# EAGLE board PCBGNDPlane (EAGLE 9.6.2), part 1 of 2
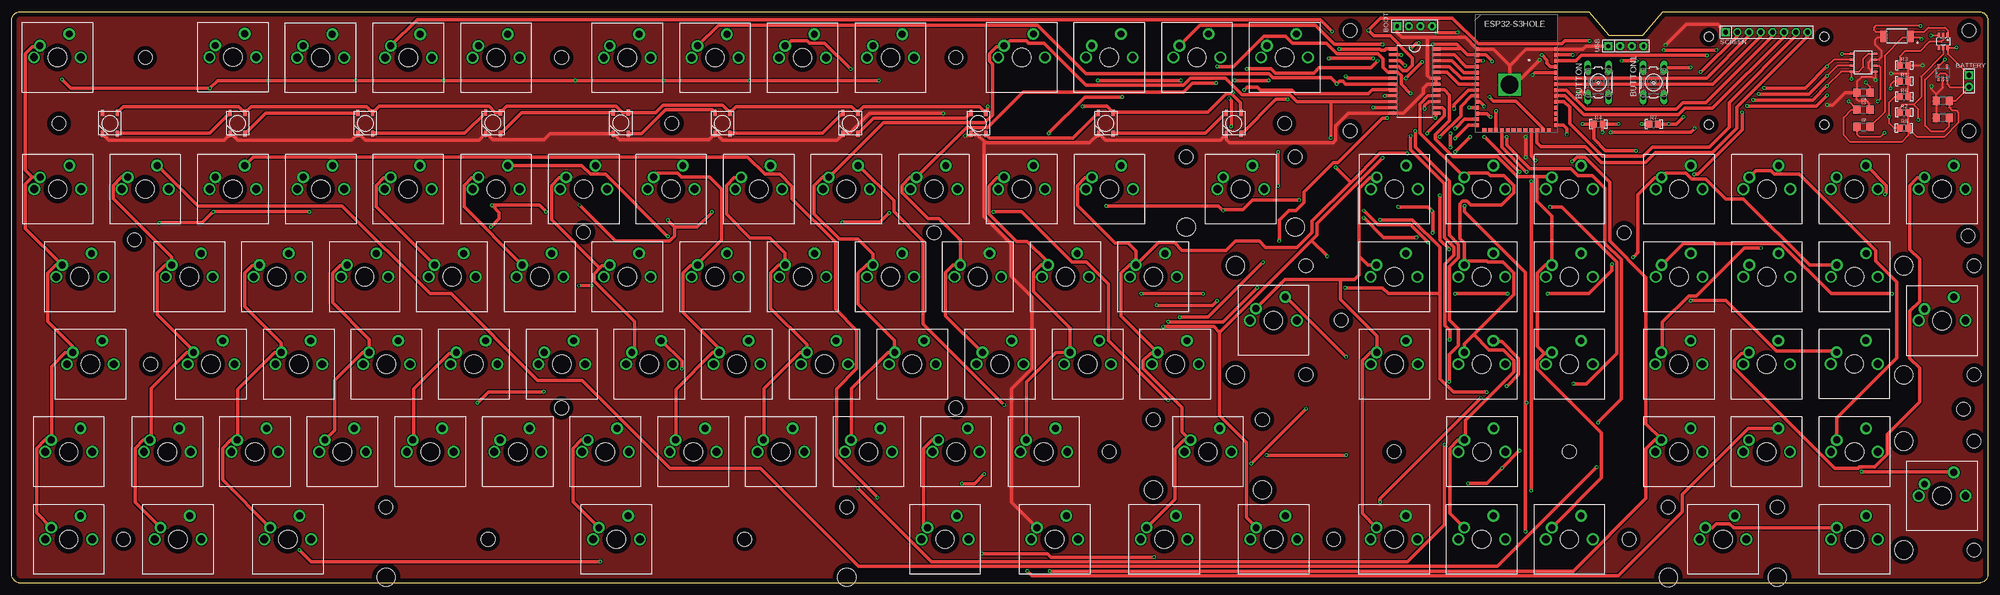
[diagram p0: board, top side]
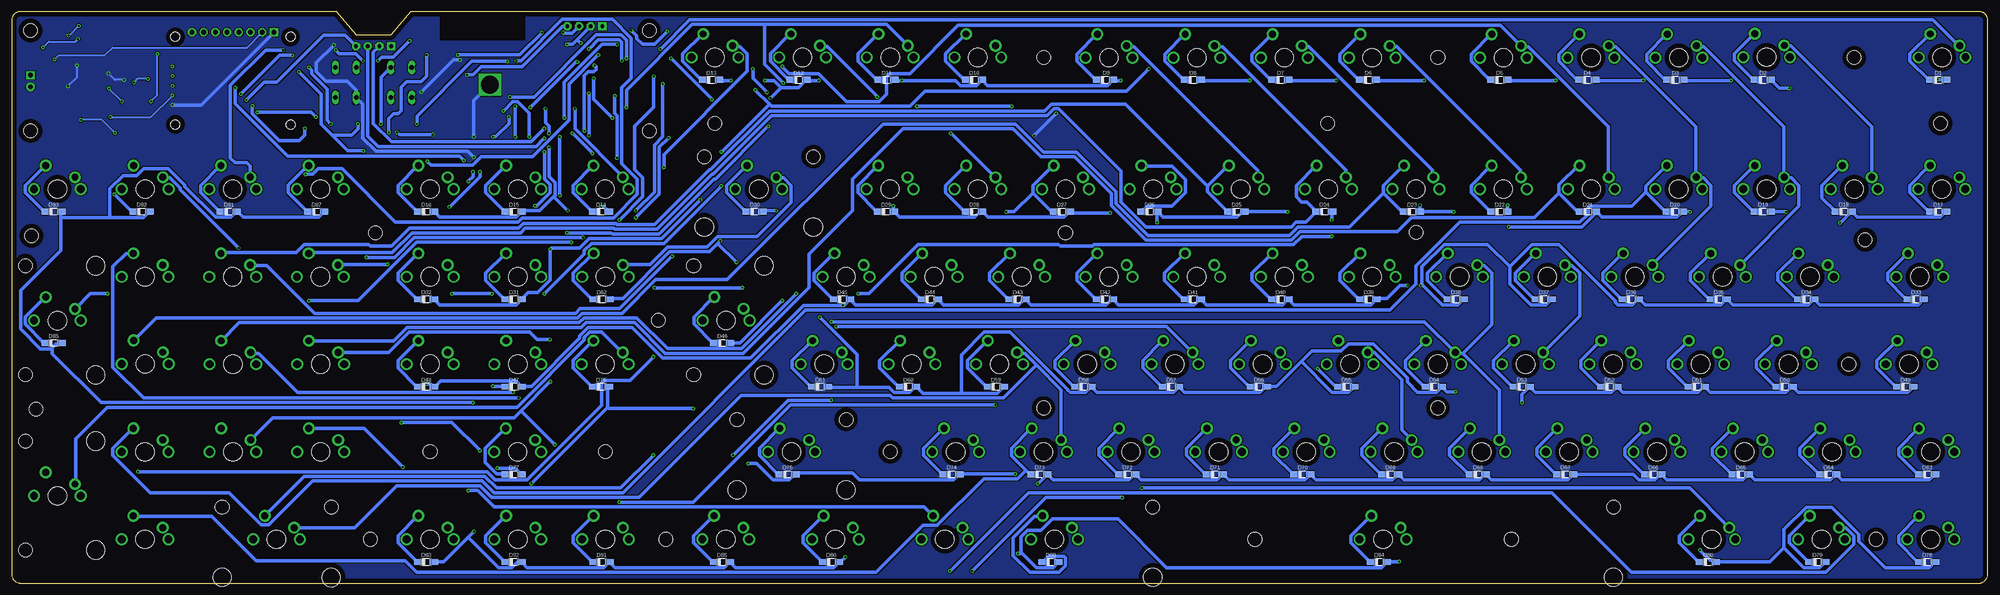
[diagram p1: board, bottom side, seen from below]

Size 428.5 x 124 mm. Coordinates in mm from the lower left corner, seen from the top.
Outline: 428.5,122 428.5,2 arc-90 426.5,0 2.1,0 arc-93 0,2 0,122 arc-90 2,124 342,124 346.35,118.9 353.65,118.9 358,124 426.5,124 arc-90 428.5,122
Copper layers (1*16): Top 0.035mm / dielectric 1.5mm / Bottom 0.035mm
Design rules "default *": minimum track width 15mil, minimum drill 0.35mm, track to track 8mil, track to pad 8mil, pad to pad 8mil, via to via 8mil, smd to smd 6mil, copper to edge 40mil, drill to drill 14mil, minimum pad ring 10mil, minimum via ring 8mil, stop-mask expansion 4mil, vias tented up to drill 0mil, thermal gap 10mil
Net classes: 0 default: width 0.203 mm
Holes 3 mm at 81.2,16.5 181.05,16.5 382.82,16.5 359.18,16.5 425.5,30.82 425.5,7.18 425.5,45.18 425.5,68.83 271.2,35.5 247.55,35.5 280.63,45.18 280.62,68.83 278.32,92.5 254.68,92.5 29,114 119.25,114 204.75,114 10.3,99.75 143.15,99.75 276,99.75 290.25,98.12 290.25,119.88 424.38,119.88 424.38,98.12 423.17,37.77 350.66,9.5 337.75,28.5 424.18,75.36 349.63,76 299.75,28.5 288.25,57 286.68,9.5 238,28.5 204.75,38 158.92,9.5 103.33,9.5 24.25,9.5 119.25,38 200,76 124,76.12 26.62,74.5 30.19,47.5
Holes 4 mm at 81.2,1.25 181.07,1.25 382.82,1.25 359.18,1.24 410.24,7.17 410.24,30.82 410.24,45.18 410.25,68.82 271.2,20.25 247.55,20.25 265.37,45.18 265.37,68.83 254.68,77.25 278.32,77.24
Holes 2 mm at 368,118.5 393,118.5 368,99.5 393,99.5
tKeepout: area 317.2,117.5 to 335.3,123.8
bKeepout: area 317.2,117.5 to 335.3,123.8

## Footprints (pad centres in the part's own frame; a part is rotated, then mirrored left to right if it is on the bottom)
SIP-100-02-40 = drill 1.016 pad 1.778 square: 1 -1.27,0 | drill 1.016 pad 1.778 octagon: 2 1.27,0
SIP-100-04-32 = drill 0.813 pad 1.778 square: 1 -3.81,0 | drill 0.813 pad 1.778 octagon: 2 -1.27,0; 3 1.27,0; 4 3.81,0
B3F-10XX = drill 1.016 long: 1 -3.251,2.261; 2 3.251,2.261; 3 -3.251,-2.261; 4 3.251,-2.261
1206 = smd 1.6 x 1.8: 1 -1.4,0; 2 1.4,0
SOD123FL = smd 1.8 x 1.25: A 1.7,0; C -1.7,0
CHERRY-MX = drill 1.714 pad 1.93: P$3 -5.08,0; P$4 5.08,0 | drill 1.5 pad 2.54: SW1 -3.81,2.54; SW2 2.54,5.08 | hole 4: 0,0
SOP65P640X120-8N = smd 1.56 x 0.4: 1 -2.88,0.975; 2 -2.88,0.325; 3 -2.88,-0.325; 4 -2.88,-0.975; 5 2.88,-0.975; 6 2.88,-0.325; 7 2.88,0.325; 8 2.88,0.975
R-0805 = smd 1.3 x 1.5: 1 -0.95,0; 2 0.95,0
SIP-100-08-40 = drill 1.016 pad 1.778 square: 1 -8.89,0 | drill 1.016 pad 1.778 octagon: 2 -6.35,0; 3 -3.81,0; 4 -1.27,0; 5 1.27,0; 6 3.81,0; 7 6.35,0; 8 8.89,0
ESP32-S3HOLE = smd 0.838 x 0.889: 1 -8.581,5.254; 2 -8.581,3.984; 3 -8.581,2.714; 4 -8.581,1.444; 5 -8.581,0.174; 6 -8.581,-1.096; 7 -8.581,-2.366; 8 -8.581,-3.636; 9 -8.581,-4.906; 10 -8.581,-6.176; 11 -8.581,-7.446; 12 -8.581,-8.716; 13 -8.581,-9.986; 14 -8.581,-11.256; 27 8.581,-11.256; 28 8.581,-9.986; 29 8.581,-8.716; 30 8.581,-7.446; 31 8.581,-6.176; 32 8.581,-4.906; 33 8.581,-3.636; 34 8.581,-2.366; 35 8.581,-1.096; 36 8.581,0.174; 37 8.581,1.444; 38 8.581,2.714; 39 8.581,3.984; 40 8.581,5.254 | smd 0.889 x 0.838: 15 -6.985,-12.331; 16 -5.715,-12.331; 17 -4.445,-12.331; 18 -3.175,-12.331; 19 -1.905,-12.331; 20 -0.635,-12.331; 21 0.635,-12.331; 22 1.905,-12.331; 23 3.175,-12.331; 24 4.445,-12.331; 25 5.715,-12.331; 26 6.985,-12.331 | drill 3.81 pad 4.191 square: 41 -1.499,-2.464
ME6211C33M5G = smd 0.953 x 0.559: 1 -1.378,0.94; 2 -1.378,0; 3 -1.378,-0.94; 4 1.378,-0.94; 5 1.378,0.94
WS2812B5050 = smd 1.422 x 0.711: LED_DI 4.8,4.1; LED_DO 0.2,0.9; LED_GND 4.8,0.9; LED_VDD 0.2,4.1
74HC154D = smd 2.05 x 0.6: 1 -4.655,6.985; 2 -4.655,5.715; 3 -4.655,4.445; 4 -4.655,3.175; 5 -4.655,1.905; 6 -4.655,0.635; 7 -4.655,-0.635; 8 -4.655,-1.905; 9 -4.655,-3.175; 10 -4.655,-4.445; 11 -4.655,-5.715; 12 -4.655,-6.985; 13 4.655,-6.985; 14 4.655,-5.715; 15 4.655,-4.445; 16 4.655,-3.175; 17 4.655,-1.905; 18 4.655,-0.635; 19 4.655,0.635; 20 4.655,1.905; 21 4.655,3.175; 22 4.655,4.445; 23 4.655,5.715; 24 4.655,6.985
SOT23-8 = smd 0.42 x 0.835: 1 -1.905,-2.58; 2 -0.635,-2.58; 3 0.635,-2.58; 4 1.905,-2.58; 5 1.905,2.58; 6 0.635,2.58; 7 -0.635,2.58; 8 -1.905,2.58
SOT23-6 = smd 0.55 x 1.2: 1 -0.95,-1.3; 2 0,-1.3; 3 0.95,-1.3; 4 0.95,1.3; 5 0,1.3; 6 -0.95,1.3

## Placement (x,y rotation side)
BATTERY  F-1X02-SIP-100-40  [SIP-100-02-40]  424.4,108.9 270 top
BOOT  BOOT  [SIP-100-04-32]  304.2,120.8 0 top
BUTTON  1  [B3F-10XX]  344,108.6 90 top
BUTTON1  1  [B3F-10XX]  356,108.6 90 top
C1  1.0uF  [1206]  401.5,102.7 0 top
C2  1.0uF  [1206]  401.5,99 0 top
C3  1.0uF  [1206]  418.7,104.6 180 top
C4  1.0uF  [1206]  401.5,106.4 180 top
C5  1.0uF  [1206]  418.7,100.9 180 top
D1  [SOD123FL]  10.8,109.2 0 bottom
D2  [SOD123FL]  48.8,109.2 0 bottom
D3  [SOD123FL]  67.8,109.2 0 bottom
D4  [SOD123FL]  86.9,109.2 0 bottom
D5  [SOD123FL]  105.9,109.2 0 bottom
D6  [SOD123FL]  134.4,109.2 0 bottom
D7  [SOD123FL]  153.4,109.2 0 bottom
D8  [SOD123FL]  172.4,109.2 0 bottom
D9  [SOD123FL]  191.4,109.2 0 bottom
D10  [SOD123FL]  219.8,109.2 0 bottom
D11  [SOD123FL]  238.8,109.2 0 bottom
D12  [SOD123FL]  257.9,109.2 0 bottom
D13  [SOD123FL]  276.8,109.2 0 bottom
D14  [SOD123FL]  300.7,80.6 0 bottom
D15  [SOD123FL]  319.6,80.6 0 bottom
D16  [SOD123FL]  338.6,80.6 0 bottom
D17  [SOD123FL]  10.8,80.6 0 bottom
D18  [SOD123FL]  31.3,80.6 0 bottom
D19  [SOD123FL]  48.8,80.6 0 bottom
D20  [SOD123FL]  67.9,80.6 0 bottom
D21  [SOD123FL]  86.8,80.6 0 bottom
D22  [SOD123FL]  105.9,80.6 0 bottom
D23  [SOD123FL]  124.9,80.6 0 bottom
D24  [SOD123FL]  143.9,80.6 0 bottom
D25  [SOD123FL]  162.9,80.6 0 bottom
D26  [SOD123FL]  181.8,80.6 0 bottom
D27  [SOD123FL]  200.8,80.6 0 bottom
D28  [SOD123FL]  219.8,80.6 0 bottom
D29  [SOD123FL]  238.9,80.6 0 bottom
D30  [SOD123FL]  267.4,80.6 0 bottom
D31  [SOD123FL]  319.6,61.6 0 bottom
D32  [SOD123FL]  338.6,61.6 0 bottom
D33  [SOD123FL]  15.6,61.6 0 bottom
D34  [SOD123FL]  39.4,61.6 0 bottom
D35  [SOD123FL]  58.4,61.6 0 bottom
D36  [SOD123FL]  77.4,61.6 0 bottom
D37  [SOD123FL]  96.3,61.6 0 bottom
D38  [SOD123FL]  115.4,61.6 0 bottom
D39  [SOD123FL]  134.3,61.6 0 bottom
D40  [SOD123FL]  153.4,61.6 0 bottom
D41  [SOD123FL]  172.4,61.6 0 bottom
D42  [SOD123FL]  191.4,61.6 0 bottom
D43  [SOD123FL]  210.4,61.6 0 bottom
D44  [SOD123FL]  229.4,61.6 0 bottom
D45  [SOD123FL]  248.4,61.6 0 bottom
D46  [SOD123FL]  274.4,52.1 0 bottom
D47  [SOD123FL]  319.6,42.6 0 bottom
D48  [SOD123FL]  338.6,42.6 0 bottom
D49  [SOD123FL]  17.9,42.6 0 bottom
D50  [SOD123FL]  44.1,42.6 0 bottom
D51  [SOD123FL]  63.1,42.6 0 bottom
D52  [SOD123FL]  82.1,42.6 0 bottom
D53  [SOD123FL]  101.1,42.6 0 bottom
D54  [SOD123FL]  120.1,42.6 0 bottom
D55  [SOD123FL]  139.1,42.6 0 bottom
D56  [SOD123FL]  158.1,42.6 0 bottom
D57  [SOD123FL]  177.1,42.6 0 bottom
D58  [SOD123FL]  196.1,42.6 0 bottom
D59  [SOD123FL]  215.1,42.6 0 bottom
D60  [SOD123FL]  234.1,42.6 0 bottom
D61  [SOD123FL]  253.2,42.6 0 bottom
D62  [SOD123FL]  300.6,61.6 0 bottom
D63  [SOD123FL]  13.2,23.6 0 bottom
D64  [SOD123FL]  34.6,23.6 0 bottom
D65  [SOD123FL]  53.6,23.6 0 bottom
D66  [SOD123FL]  72.6,23.6 0 bottom
D67  [SOD123FL]  91.6,23.6 0 bottom
D68  [SOD123FL]  110.6,23.6 0 bottom
D69  [SOD123FL]  129.6,23.6 0 bottom
D70  [SOD123FL]  148.6,23.6 0 bottom
D71  [SOD123FL]  167.6,23.6 0 bottom
D72  [SOD123FL]  186.6,23.6 0 bottom
D73  [SOD123FL]  205.6,23.6 0 bottom
D74  [SOD123FL]  224.7,23.6 0 bottom
D75  [SOD123FL]  260.3,23.6 0 bottom
D76  [SOD123FL]  300.7,42.6 0 bottom
D77  [SOD123FL]  319.6,23.6 0 bottom
D78  [SOD123FL]  13.2,4.6 0 bottom
D79  [SOD123FL]  37,4.6 0 bottom
D80  [SOD123FL]  60.7,4.6 0 bottom
D81  [SOD123FL]  381.4,80.6 0 bottom
D82  [SOD123FL]  400.3,80.6 0 bottom
D83  [SOD123FL]  419.4,80.6 0 bottom
D84  [SOD123FL]  132,4.6 0 bottom
D85  [SOD123FL]  419.4,52.1 0 bottom
D86  [SOD123FL]  274.5,4.6 0 bottom
D87  [SOD123FL]  362.4,80.6 0 bottom
D88  [SOD123FL]  203.2,4.6 0 bottom
D90  [SOD123FL]  250.8,4.6 0 bottom
D91  [SOD123FL]  300.6,4.6 0 bottom
D92  [SOD123FL]  319.6,4.6 0 bottom
D93  [SOD123FL]  338.6,4.6 0 bottom
DUPLICADO1  CHERRY-MX  [CHERRY-MX]  361.5,28.5 0 top
DUPLICADO2  CHERRY-MX  [CHERRY-MX]  380.5,28.5 0 top
DUPLICADO3  CHERRY-MX  [CHERRY-MX]  399.55,28.5 0 top
DUPLICADO4  CHERRY-MX  [CHERRY-MX]  361.5,47.5 0 top
DUPLICADO5  CHERRY-MX  [CHERRY-MX]  380.5,47.5 0 top
DUPLICADO6  CHERRY-MX  [CHERRY-MX]  399.5,47.55 0 top
DUPLICADO7  CHERRY-MX  [CHERRY-MX]  361.55,66.45 0 top
DUPLICADO8  CHERRY-MX  [CHERRY-MX]  380.55,66.45 0 top
DUPLICADO9  CHERRY-MX  [CHERRY-MX]  399.55,66.45 0 top
DUPLICADO10  CHERRY-MX  [CHERRY-MX]  371.05,9.5 0 top
ENTERDUPLICADO  CHERRY-MX  [CHERRY-MX]  418.55,18.95 0 top
FN_KEY  CHERRY-MX  [CHERRY-MX]  226.15,9.5 0 top
PUNTODUPLICADO  CHERRY-MX  [CHERRY-MX]  399.55,9.5 0 top
Q1  FS8205A  [SOP65P640X120-8N]  408.8,118.6 180 top
R1  1K  [R-0805]  410.3,108.9 0 top
R2  1K  [R-0805]  410.3,102.1 0 top
R3  1K  [R-0805]  410.3,112.3 0 top
R4  1K  [R-0805]  344,99.6 0 top
R5  1M  [R-0805]  410.3,98.7 180 top
R6  8200000  [R-0805]  410.3,105.5 0 top
R7  1K  [R-0805]  356,99.6 0 top
SCREEN  F-1X08-SIP-100-40  [SIP-100-08-40]  380.5,119.5 0 top
U1  ESP32-S3HOLE  [ESP32-S3HOLE]  326.3,110.6 0 top
U2  ME6211C33M5G  [ME6211C33M5G]  418.7,110.7 90 top
U$1  CHERRY-MX  [CHERRY-MX]  12.41,9.49 0 top
U$2  CHERRY-MX  [CHERRY-MX]  12.4,28.5 0 top
U$3  CHERRY-MX  [CHERRY-MX]  17.1,47.5 0 top
U$4  CHERRY-MX  [CHERRY-MX]  14.8,66.45 0 top
U$5  CHERRY-MX  [CHERRY-MX]  10,85.5 0 top
U$6  CHERRY-MX  [CHERRY-MX]  9.95,114.05 0 top
U$7  CHERRY-MX  [CHERRY-MX]  36.1,9.5 0 top
U$8  CHERRY-MX  [CHERRY-MX]  33.8,28.5 0 top
U$9  CHERRY-MX  [CHERRY-MX]  43.25,47.5 0 top
U$10  CHERRY-MX  [CHERRY-MX]  38.55,66.45 0 top
U$11  CHERRY-MX  [CHERRY-MX]  29,85.5 0 top
U$12  CHERRY-MX  [CHERRY-MX]  48,114.1 0 top
U$13  CHERRY-MX  [CHERRY-MX]  59.9,9.5 0 top
U$14  CHERRY-MX  [CHERRY-MX]  52.75,28.5 0 top
U$15  CHERRY-MX  [CHERRY-MX]  62.3,47.5 0 top
U$16  CHERRY-MX  [CHERRY-MX]  57.55,66.45 0 top
U$17  CHERRY-MX  [CHERRY-MX]  48,85.5 0 top
U$18  CHERRY-MX  [CHERRY-MX]  67,114 0 top
U$19  CHERRY-MX  [CHERRY-MX]  380.55,85.5 0 top
U$20  CHERRY-MX  [CHERRY-MX]  71.75,28.5 0 top
U$21  CHERRY-MX  [CHERRY-MX]  81.3,47.5 0 top
U$22  CHERRY-MX  [CHERRY-MX]  76.55,66.45 0 top
U$23  CHERRY-MX  [CHERRY-MX]  67.05,85.5 0 top
U$24  CHERRY-MX  [CHERRY-MX]  86.05,114 0 top
U$25  CHERRY-MX  [CHERRY-MX]  399.5,85.5 0 top
U$26  CHERRY-MX  [CHERRY-MX]  90.8,28.5 0 top
U$27  CHERRY-MX  [CHERRY-MX]  100.25,47.5 0 top
U$28  CHERRY-MX  [CHERRY-MX]  95.5,66.45 0 top
U$29  CHERRY-MX  [CHERRY-MX]  86,85.5 0 top
U$30  CHERRY-MX  [CHERRY-MX]  105.05,114 0 top
U$31  CHERRY-MX  [CHERRY-MX]  418.55,85.5 0 top
U$32  CHERRY-MX  [CHERRY-MX]  109.75,28.5 0 top
U$33  CHERRY-MX  [CHERRY-MX]  119.3,47.5 0 top
U$34  CHERRY-MX  [CHERRY-MX]  114.55,66.45 0 top
U$35  CHERRY-MX  [CHERRY-MX]  105.05,85.5 0 top
U$36  CHERRY-MX  [CHERRY-MX]  133.5,114 0 top
U$37  CHERRY-MX  [CHERRY-MX]  131.15,9.5 0 top
U$38  CHERRY-MX  [CHERRY-MX]  128.75,28.5 0 top
U$39  CHERRY-MX  [CHERRY-MX]  138.3,47.5 0 top
U$40  CHERRY-MX  [CHERRY-MX]  133.5,66.45 0 top
U$41  CHERRY-MX  [CHERRY-MX]  124.05,85.5 0 top
U$42  CHERRY-MX  [CHERRY-MX]  152.55,114 0 top
U$43  CHERRY-MX  [CHERRY-MX]  418.55,56.95 0 top
U$44  CHERRY-MX  [CHERRY-MX]  147.8,28.5 0 top
U$45  CHERRY-MX  [CHERRY-MX]  157.25,47.5 0 top
U$46  CHERRY-MX  [CHERRY-MX]  152.55,66.45 0 top
U$47  CHERRY-MX  [CHERRY-MX]  143,85.5 0 top
U$48  CHERRY-MX  [CHERRY-MX]  171.5,114 0 top
U$49  CHERRY-MX  [CHERRY-MX]  273.65,9.5 0 top
U$50  CHERRY-MX  [CHERRY-MX]  166.8,28.5 0 top
U$51  CHERRY-MX  [CHERRY-MX]  176.25,47.5 0 top
U$52  CHERRY-MX  [CHERRY-MX]  171.55,66.45 0 top
U$53  CHERRY-MX  [CHERRY-MX]  162,85.5 0 top
U$54  CHERRY-MX  [CHERRY-MX]  190.55,114 0 top
U$55  CHERRY-MX  [CHERRY-MX]  361.55,85.5 0 top
U$56  CHERRY-MX  [CHERRY-MX]  185.8,28.5 0 top
U$57  CHERRY-MX  [CHERRY-MX]  195.3,47.5 0 top
U$58  CHERRY-MX  [CHERRY-MX]  190.55,66.45 0 top
U$59  CHERRY-MX  [CHERRY-MX]  181,85.5 0 top
U$60  CHERRY-MX  [CHERRY-MX]  219,114.05 0 top
U$61  CHERRY-MX  [CHERRY-MX]  202.4,9.5 0 top
U$62  CHERRY-MX  [CHERRY-MX]  204.75,28.5 0 top
U$63  CHERRY-MX  [CHERRY-MX]  214.3,47.5 0 top
U$64  CHERRY-MX  [CHERRY-MX]  209.5,66.45 0 top
U$65  CHERRY-MX  [CHERRY-MX]  200,85.5 0 top
U$66  CHERRY-MX  [CHERRY-MX]  238,114.05 0 top
U$67  WS2812B5050  [WS2812B5050]  262.5,102.25 270 top
U$68  CHERRY-MX  [CHERRY-MX]  223.8,28.5 0 top
U$69  CHERRY-MX  [CHERRY-MX]  233.3,47.5 0 top
U$70  CHERRY-MX  [CHERRY-MX]  228.5,66.45 0 top
U$71  CHERRY-MX  [CHERRY-MX]  219,85.5 0 top
U$72  CHERRY-MX  [CHERRY-MX]  257,114.05 0 top
U$73  CHERRY-MX  [CHERRY-MX]  249.9,9.5 0 top
U$74  CHERRY-MX  [CHERRY-MX]  259.4,28.5 0 top
U$75  CHERRY-MX  [CHERRY-MX]  252.3,47.5 0 top
U$76  CHERRY-MX  [CHERRY-MX]  247.55,66.45 0 top
U$77  CHERRY-MX  [CHERRY-MX]  238.05,85.5 0 top
U$78  CHERRY-MX  [CHERRY-MX]  276,114.05 0 top
U$79  CHERRY-MX  [CHERRY-MX]  299.75,9.5 0 top
U$80  CHERRY-MX  [CHERRY-MX]  299.8,47.5 0 top
U$81  CHERRY-MX  [CHERRY-MX]  299.75,66.45 0 top
U$82  CHERRY-MX  [CHERRY-MX]  273.6,57 0 top
U$83  CHERRY-MX  [CHERRY-MX]  266.5,85.5 0 top
U$84  CHERRY-MX  [CHERRY-MX]  299.8,85.5 0 top
U$85  CHERRY-MX  [CHERRY-MX]  318.75,9.5 0 top
U$86  CHERRY-MX  [CHERRY-MX]  318.8,28.5 0 top
U$87  CHERRY-MX  [CHERRY-MX]  318.75,47.5 0 top
U$88  CHERRY-MX  [CHERRY-MX]  318.75,66.45 0 top
U$89  CHERRY-MX  [CHERRY-MX]  318.75,85.5 0 top
U$90  CHERRY-MX  [CHERRY-MX]  337.75,9.5 0 top
U$91  CHERRY-MX  [CHERRY-MX]  337.75,47.5 0 top
U$92  CHERRY-MX  [CHERRY-MX]  337.75,66.45 0 top
U$93  CHERRY-MX  [CHERRY-MX]  337.75,85.5 0 top
U$94  74HC154D  [74HC154D]  304.2,108.9 0 top
U$95  TP4056  [SOT23-8]  401.5,112.9 90 top
U$96  DW01A  [SOT23-6]  418.8,117.5 180 top
U$97  WS2812B5050  [WS2812B5050]  234.75,102.25 270 top
U$98  WS2812B5050  [WS2812B5050]  207.1,102.25 270 top
U$99  WS2812B5050  [WS2812B5050]  179.35,102.25 270 top
U$100  WS2812B5050  [WS2812B5050]  151.65,102.25 270 top
U$101  WS2812B5050  [WS2812B5050]  129.6,102.3 270 top
U$102  WS2812B5050  [WS2812B5050]  101.9,102.3 270 top
U$103  WS2812B5050  [WS2812B5050]  74.2,102.25 270 top
U$104  WS2812B5050  [WS2812B5050]  46.5,102.25 270 top
U$105  WS2812B5050  [WS2812B5050]  18.8,102.25 270 top
USB  F-1X04-SIP-100-32  [SIP-100-04-32]  350,116.5 0 top

## Library data of the parts
BATTERY BOOT SCREEN USB = con-headers-jp
BUTTON BUTTON1 = switch-omron; MPN: B3F-1000; OC_FARNELL: 176432; OC_NEWARK: 36M3542
C1-C5 = SparkFun-Capacitors; PROD_ID: CAP-09822
D1-D88 D90-D93 = bt_diode
DUPLICADO1-DUPLICADO10 ENTERDUPLICADO FN_KEY PUNTODUPLICADO U$1-U$66 U$68-U$93 = cherrymx
Q1 = FS8205A; AVAILABILITY: Not in stock; CHECK_PRICES: https://www.snapeda.com/parts/FS8205A/Fortune+Semiconductor/view-part/?ref=eda; MF: Fortune Semiconductor; MP: FS8205A; PACKAGE: Package; PRICE: None; SNAPEDA_LINK: https://www.snapeda.com/parts/FS8205A/Fortune+Semiconductor/view-part/?ref=snap
R1-R7 = resistors; MOUSER: 660-RK73H2ATTD1001F
U1 = Esp32S3-Hole; COPYRIGHT: Copyright (C) 2023 Ultra Librarian. All rights reserved.; MANUFACTURER_PART_NUMBER: ESP32-S3-WROOM-1-N8; MFR_NAME: Espressif Systems
U2 = ME6211; COPYRIGHT: Copyright (C) 2023 Ultra Librarian. All rights reserved.; MANUFACTURER_PART_NUMBER: RT9080-33GJ5; MFR_NAME: Richtek Technology
U$67 U$97-U$105 = Led-WS2812B
U$94 = 74HC154D 653
U$95 = TP4056
U$96 = DW01A

## Nets
B+: BATTERY.2 C1.1 C3.1 R2.2 R5.1 U2.1 U2.3 U$95.5
B-: BATTERY.1 C2.2 Q1.2 Q1.3 U$96.6
BATLEVEL: R5.2 R6.1 U1.39
BLK: SCREEN.8 U1.24
CHRG: U1.38 U$95.7
COD0: U1.4 U$94.23
COD1: U1.5 U$94.22
COD2: U1.6 U$94.21
COD3: U1.7 U$94.20
CS: SCREEN.7 U1.31
D+: U1.14 USB.3
D-: U1.13 USB.2
DC: SCREEN.6 U1.32
DWCS: R3.1 U$96.2
DWOC: Q1.5 U$96.3
DWOD: Q1.4 U$96.1
DWVCC: C2.1 R2.1 U$96.5
E0: D1.A D2.A D3.A D4.A D5.A D6.A D7.A D8.A D9.A D10.A D11.A D12.A D13.A D14.A D15.A D16.A U1.8
E1: D17.A D18.A D19.A D20.A D21.A D22.A D23.A D24.A D25.A D26.A D27.A D28.A D29.A D30.A D31.A D32.A U1.9
E2: D33.A D34.A D35.A D36.A D37.A D38.A D39.A D40.A D41.A D42.A D43.A D44.A D45.A D46.A D47.A D48.A U1.10
E3: D49.A D50.A D51.A D52.A D53.A D54.A D55.A D56.A D57.A D58.A D59.A D60.A D61.A D62.A U1.11
E4: D63.A D64.A D65.A D66.A D67.A D68.A D69.A D70.A D71.A D72.A D73.A D74.A D75.A D76.A D77.A U1.12
E5: D78.A D79.A D80.A D81.A D82.A D83.A D84.A D85.A D86.A D87.A D88.A D90.A D91.A D92.A D93.A U1.17
EN: BUTTON1.4 R7.2 U1.3
GND: BOOT.1 BUTTON1.1 BUTTON.1 C1.2 C3.2 C4.2 C5.2 FN_KEY.SW1 Q1.6 Q1.7 R1.2 R3.2 R6.2 SCREEN.1 U1.1 U1.40 U1.41 U2.2 U$67.LED_GND U$94.12 U$94.18 U$94.19 U$95.1 U$95.3 U$97.LED_GND U$98.LED_GND U$99.LED_GND U$100.LED_GND U$101.LED_GND U$102.LED_GND U$103.LED_GND U$104.LED_GND U$105.LED_GND USB.1
INVCC: C4.1 U$95.4 U$95.8 USB.4
KEY_FN: FN_KEY.SW2 U1.18
LEDS: U1.25 U$67.LED_DI
MUX0 [Keys]: U$1.SW1 U$2.SW1 U$3.SW1 U$4.SW1 U$5.SW1 U$6.SW1 U$94.1
MUX1 [Keys]: DUPLICADO1.SW1 U$7.SW1 U$8.SW1 U$9.SW1 U$10.SW1 U$11.SW1 U$12.SW1 U$94.2
MUX2 [Keys]: DUPLICADO2.SW1 U$13.SW1 U$14.SW1 U$15.SW1 U$16.SW1 U$17.SW1 U$18.SW1 U$94.3
MUX3 [Keys]: DUPLICADO3.SW1 U$19.SW1 U$20.SW1 U$21.SW1 U$22.SW1 U$23.SW1 U$24.SW1 U$94.4
MUX4 [Keys]: DUPLICADO4.SW1 U$25.SW1 U$26.SW1 U$27.SW1 U$28.SW1 U$29.SW1 U$30.SW1 U$94.5
MUX5 [Keys]: DUPLICADO5.SW1 U$31.SW1 U$32.SW1 U$33.SW1 U$34.SW1 U$35.SW1 U$36.SW1 U$94.6
MUX6 [Keys]: DUPLICADO6.SW1 U$37.SW1 U$38.SW1 U$39.SW1 U$40.SW1 U$41.SW1 U$42.SW1 U$94.7
MUX7 [Keys]: DUPLICADO7.SW1 U$43.SW1 U$44.SW1 U$45.SW1 U$46.SW1 U$47.SW1 U$48.SW1 U$94.8
MUX8 [Keys]: DUPLICADO8.SW1 U$49.SW1 U$50.SW1 U$51.SW1 U$52.SW1 U$53.SW1 U$54.SW1 U$94.9
MUX9 [Keys]: DUPLICADO9.SW1 U$55.SW1 U$56.SW1 U$57.SW1 U$58.SW1 U$59.SW1 U$60.SW1 U$94.10
MUX10 [Keys]: DUPLICADO10.SW1 PUNTODUPLICADO.SW1 U$61.SW1 U$62.SW1 U$63.SW1 U$64.SW1 U$65.SW1 U$66.SW1 U$94.11
MUX11 [Keys]: U$68.SW1 U$69.SW1 U$70.SW1 U$71.SW1 U$72.SW1 U$94.13
MUX12 [Keys]: U$73.SW1 U$74.SW1 U$75.SW1 U$76.SW1 U$77.SW1 U$78.SW1 U$94.14
MUX13 [Keys]: ENTERDUPLICADO.SW1 U$79.SW1 U$80.SW1 U$81.SW1 U$82.SW1 U$83.SW1 U$84.SW1 U$94.15
MUX14 [Keys]: U$85.SW1 U$86.SW1 U$87.SW1 U$88.SW1 U$89.SW1 U$94.16
MUX15 [Keys]: U$90.SW1 U$91.SW1 U$92.SW1 U$93.SW1 U$94.17
N$1 [Keys]: D33.C U$4.SW2
N$2 [Keys]: D34.C U$10.SW2
N$3 [Keys]: D35.C U$16.SW2
N$4 [Keys]: D36.C U$22.SW2
N$5 [Keys]: D17.C U$5.SW2
N$6 [Keys]: D1.C U$6.SW2
N$7 [Keys]: D37.C U$28.SW2
N$8 [Keys]: D38.C U$34.SW2
N$9 [Keys]: D39.C U$40.SW2
N$10 [Keys]: D40.C U$46.SW2
N$11 [Keys]: D18.C DUPLICADO1.SW2 U$11.SW2
N$12 [Keys]: D2.C U$12.SW2
N$13 [Keys]: D41.C U$52.SW2
N$14 [Keys]: D42.C U$58.SW2
N$15 [Keys]: D43.C U$64.SW2
N$16 [Keys]: D44.C U$70.SW2
N$17 [Keys]: D19.C DUPLICADO2.SW2 U$17.SW2
N$18 [Keys]: D3.C U$18.SW2
N$19 [Keys]: D45.C U$76.SW2
N$20 [Keys]: D47.C U$87.SW2
N$21 [Keys]: D48.C U$91.SW2
N$22 [Keys]: D62.C U$81.SW2
N$23 [Keys]: D20.C DUPLICADO3.SW2 U$23.SW2
N$24 [Keys]: D4.C U$24.SW2
N$25 [Keys]: D61.C U$75.SW2
N$26 [Keys]: D60.C U$69.SW2
N$27 [Keys]: D59.C U$63.SW2
N$28 [Keys]: D58.C U$57.SW2
N$29 [Keys]: D21.C DUPLICADO4.SW2 U$29.SW2
N$30 [Keys]: D5.C U$30.SW2
N$35 [Keys]: U$97.LED_DO U$98.LED_DI
N$37 [Keys]: D57.C U$51.SW2
N$38 [Keys]: D56.C U$45.SW2
N$39 [Keys]: D55.C U$39.SW2
N$40 [Keys]: D54.C U$33.SW2
N$41 [Keys]: D22.C DUPLICADO5.SW2 U$35.SW2
N$42 [Keys]: D6.C U$36.SW2
N$43 [Keys]: D53.C U$27.SW2
N$44 [Keys]: D52.C U$21.SW2
N$45 [Keys]: D51.C U$15.SW2
N$46 [Keys]: D50.C U$9.SW2
N$47 [Keys]: D23.C DUPLICADO6.SW2 U$41.SW2
N$48 [Keys]: D7.C U$42.SW2
N$49 [Keys]: D49.C U$3.SW2
N$50 [Keys]: D63.C U$2.SW2
N$51 [Keys]: D64.C U$8.SW2
N$52 [Keys]: D65.C U$14.SW2
N$53 [Keys]: D24.C DUPLICADO7.SW2 U$47.SW2
N$54 [Keys]: D8.C U$48.SW2
N$55 [Keys]: D66.C U$20.SW2
N$56 [Keys]: D67.C U$26.SW2
N$57 [Keys]: D68.C U$32.SW2
N$58 [Keys]: D69.C U$38.SW2
N$59 [Keys]: D25.C DUPLICADO8.SW2 U$53.SW2
N$60 [Keys]: D9.C U$54.SW2
N$61 [Keys]: D70.C U$44.SW2
N$62 [Keys]: D71.C U$50.SW2
N$63 [Keys]: D72.C U$56.SW2
N$64 [Keys]: D74.C U$68.SW2
N$65 [Keys]: D26.C DUPLICADO9.SW2 U$59.SW2
N$66 [Keys]: D10.C U$60.SW2
N$67 [Keys]: D75.C U$74.SW2
N$68 [Keys]: D73.C PUNTODUPLICADO.SW2 U$62.SW2
N$69 [Keys]: D76.C U$80.SW2
N$70 [Keys]: D77.C U$86.SW2
N$71 [Keys]: D27.C DUPLICADO10.SW2 U$65.SW2
N$72 [Keys]: D11.C U$66.SW2
N$73 [Keys]: D93.C U$90.SW2
N$74 [Keys]: D92.C U$85.SW2
N$75 [Keys]: D91.C U$79.SW2
N$76 [Keys]: D90.C U$73.SW2
N$77 [Keys]: D28.C U$71.SW2
N$78 [Keys]: D12.C U$72.SW2
N$79 [Keys]: U$98.LED_DO U$99.LED_DI
N$80 [Keys]: D88.C U$61.SW2
N$81 [Keys]: D87.C U$55.SW2
N$82 [Keys]: D86.C U$49.SW2
N$83 [Keys]: D29.C U$77.SW2
N$84 [Keys]: D13.C U$78.SW2
N$85 [Keys]: D85.C U$43.SW2
N$86 [Keys]: D84.C U$37.SW2
N$87 [Keys]: D83.C U$31.SW2
N$88 [Keys]: D46.C ENTERDUPLICADO.SW2 U$82.SW2
N$89 [Keys]: D30.C U$83.SW2
N$90 [Keys]: D14.C U$84.SW2
N$91 [Keys]: D82.C U$25.SW2
N$92 [Keys]: D81.C U$19.SW2
N$93 [Keys]: D80.C U$13.SW2
N$94 [Keys]: D31.C U$88.SW2
N$95 [Keys]: D15.C U$89.SW2
N$96 [Keys]: D79.C U$7.SW2
N$97 [Keys]: D78.C U$1.SW2
N$98 [Keys]: D32.C U$92.SW2
N$99 [Keys]: D16.C U$93.SW2
N$100 [Keys]: U$99.LED_DO U$100.LED_DI
N$101 [Keys]: U$100.LED_DO U$101.LED_DI
N$102 [Keys]: U$101.LED_DO U$102.LED_DI
N$103 [Keys]: U$102.LED_DO U$103.LED_DI
N$104 [Keys]: U$103.LED_DO U$104.LED_DI
N$105 [Keys]: U$104.LED_DO U$105.LED_DI
N$106 [Keys]: U$67.LED_DO U$97.LED_DI
PROG: BUTTON.4 R4.2 U1.27
RES: SCREEN.5 U1.33
RX: BOOT.4 U1.36
SCL: SCREEN.3 U1.35
SDA: SCREEN.4 U1.34
STDBY: U1.23 U$95.6
TPPROG: R1.1 U$95.2
TX: BOOT.3 U1.37
VCC: BOOT.2 C5.1 R4.1 R7.1 SCREEN.2 U1.2 U2.5 U$67.LED_VDD U$94.24 U$97.LED_VDD U$98.LED_VDD U$99.LED_VDD U$100.LED_VDD U$101.LED_VDD U$102.LED_VDD U$103.LED_VDD U$104.LED_VDD U$105.LED_VDD